# EAGLE board MultiWiiChassisv1.2 (EAGLE 5.11)
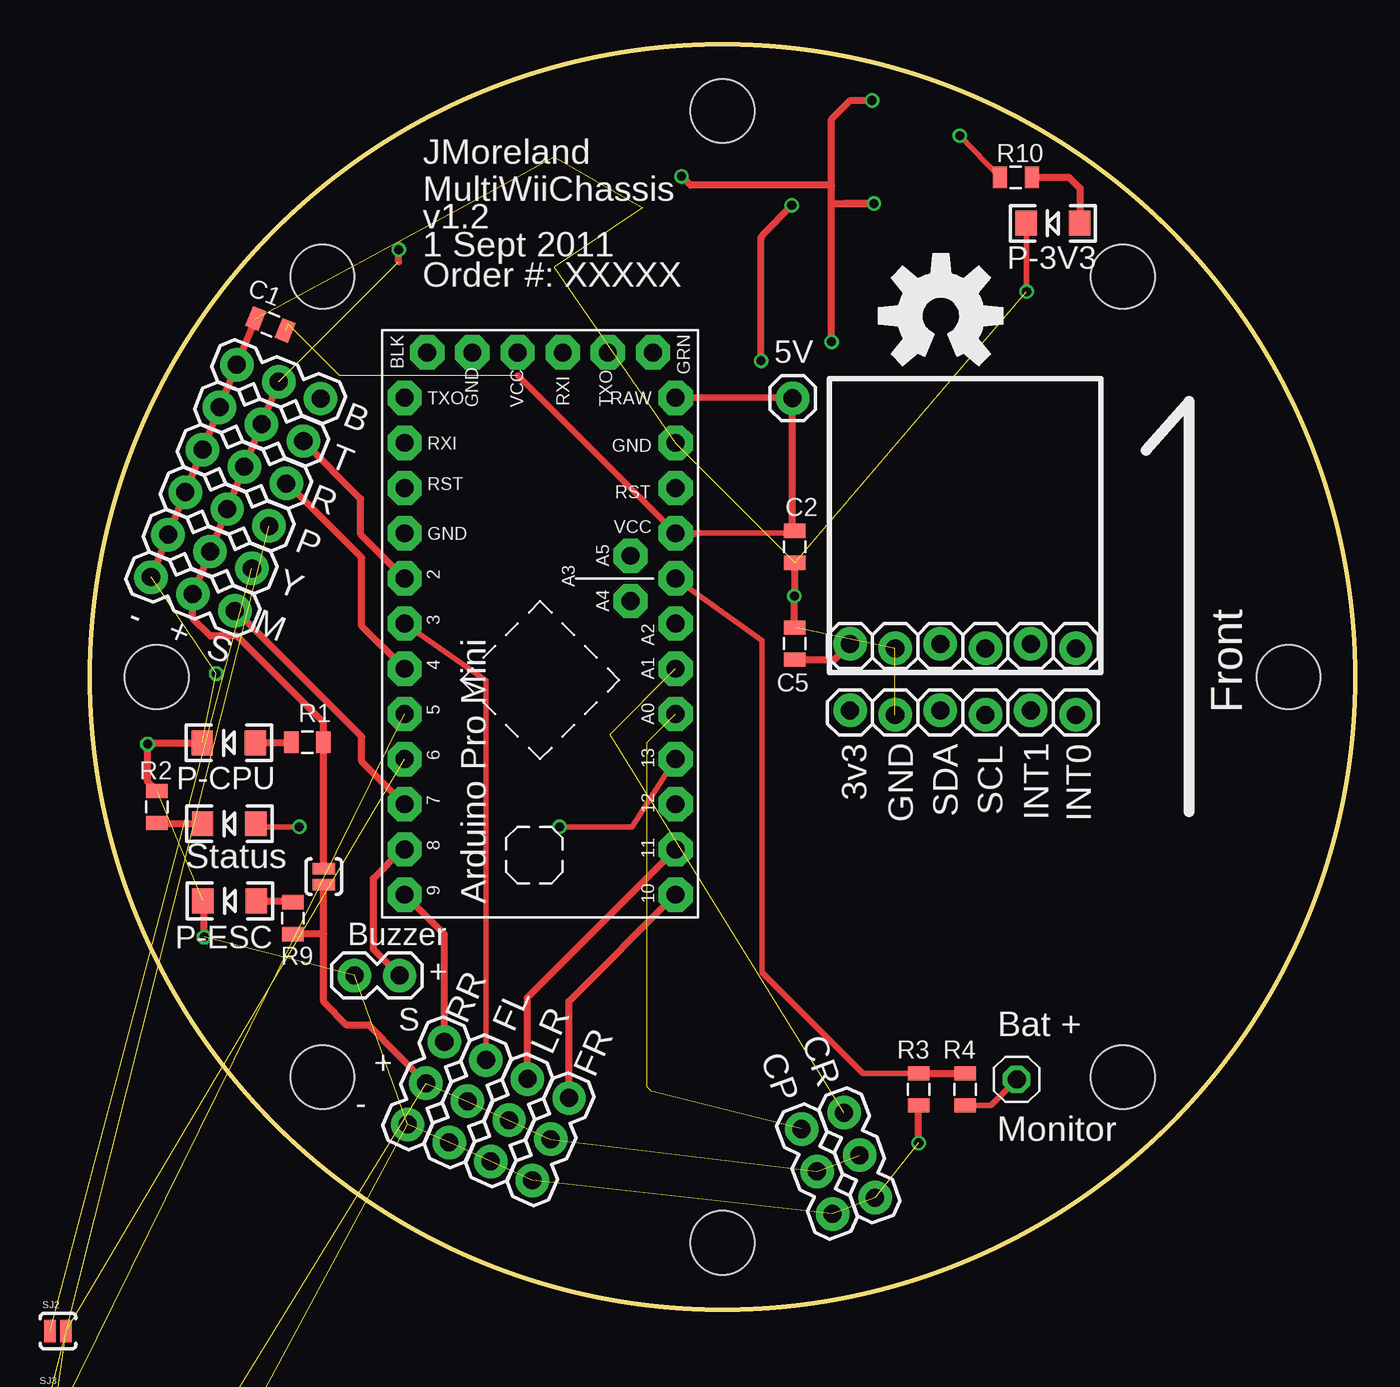
[diagram p0: board, top side]
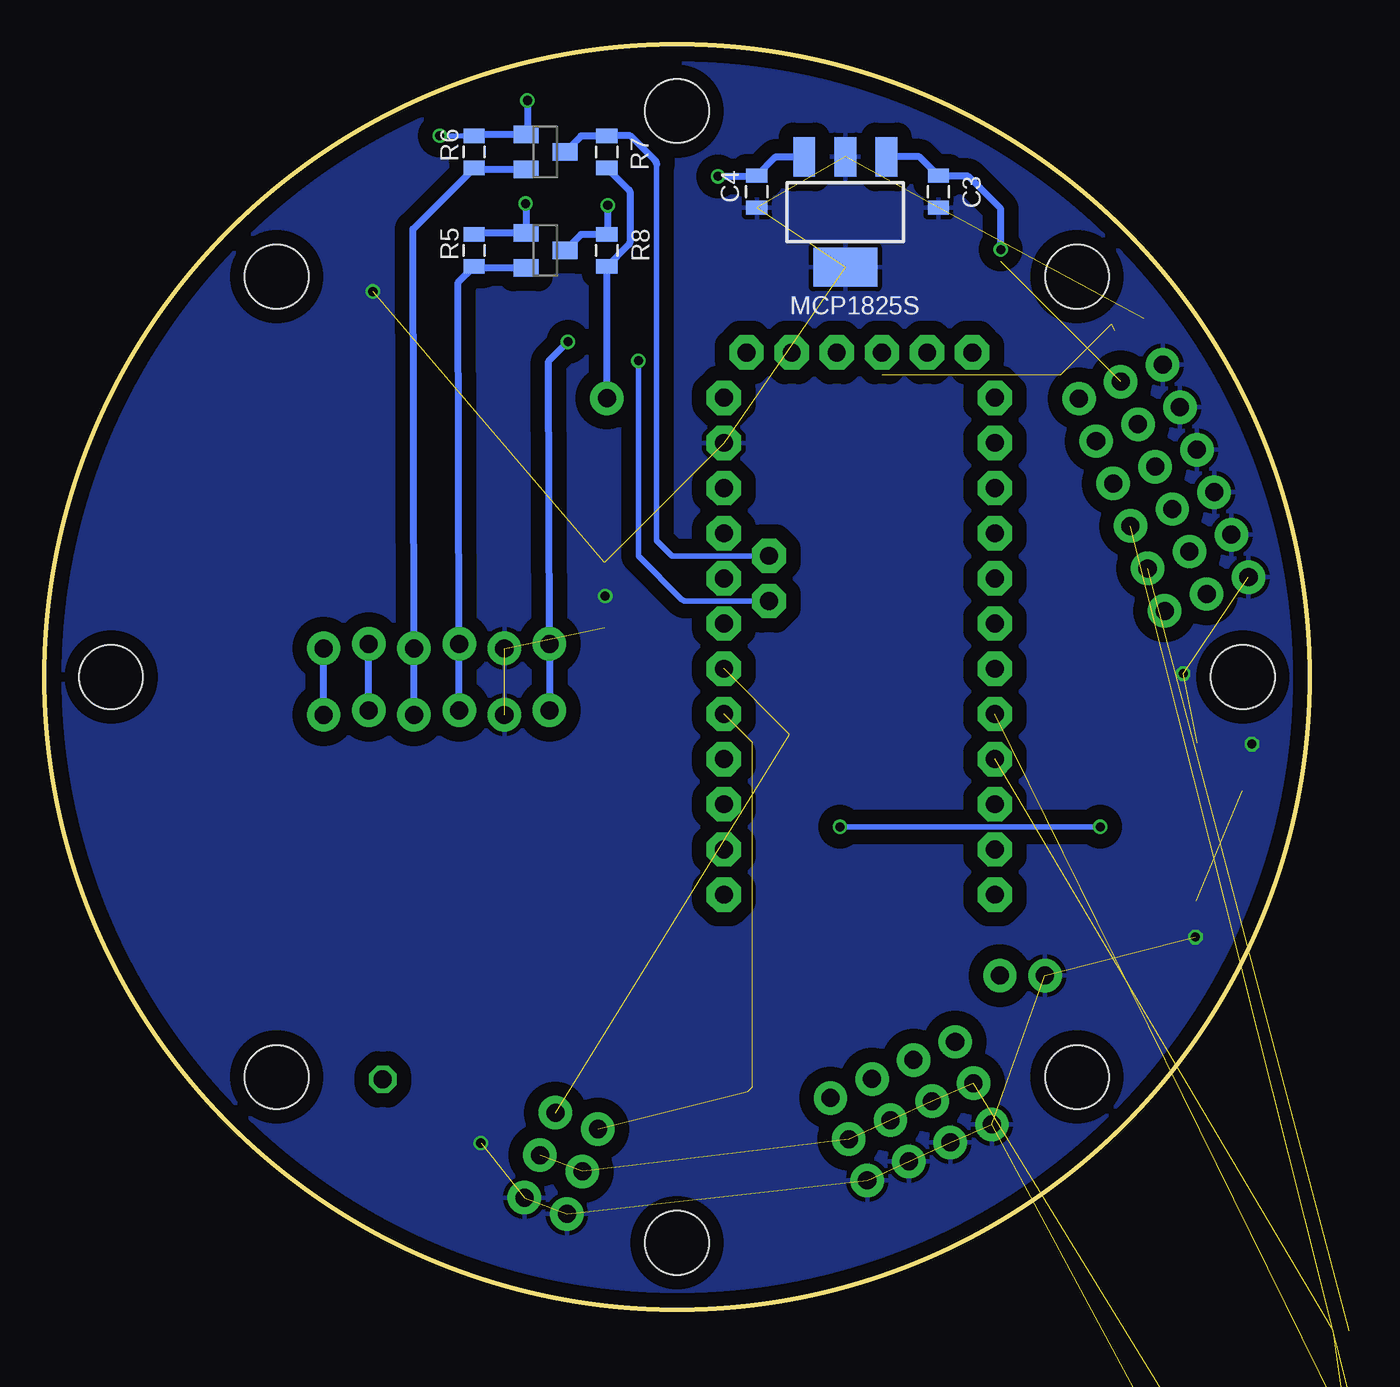
[diagram p1: board, bottom side, seen from below]

Size 71.12 x 71.12 mm. Coordinates in mm from the lower left corner, seen from the top.
Outline: circle at 35.56,35.56 radius 35.56
Copper layers (1*16): Top 0.035mm / dielectric 1.5mm / Bottom 0.035mm
Design rules "Fusion_eagle_rule_v1.1": minimum track width 6mil, minimum drill 12mil, track to track 6mil, track to pad 6mil, pad to pad 6mil, via to via 6mil, smd to smd 0mil, copper to edge 10mil, drill to drill 10mil, minimum pad ring 10mil, minimum via ring 6mil, stop-mask expansion 2mil, vias tented up to drill 100mil, thermal gap 10mil
Holes 3.6 mm at 35.56,67.38 67.38,35.56 35.56,3.74 3.74,35.56 13.06,13.06 13.06,58.06 58.06,58.06 58.06,13.06

## Footprints (pad centres in the part's own frame; a part is rotated, then mirrored left to right if it is on the bottom)
1X01 = drill 1.016 pad 1.88 round: 1 0,0
1X02 = drill 1.016 pad 1.88 round: 1 0,0; 2 2.54,0
SOT23_BOT = smd 1 x 1.4 bottom: D 0,1.1; G 0.98,-1.1; S -0.98,-1.1
0805 = smd 0.8 x 1.2: 1 -0.9,0; 2 0.9,0
1X03 = drill 1.016 pad 1.88 round: 1 0,0; 2 2.54,0; 3 5.08,0
1X01' = drill 1.016 octagon: 1 0,0
1X06_LOCK = drill 1.016 pad 1.88 round: 1 0,0; 2 2.54,-0.254; 3 5.08,0; 4 7.62,-0.254; 5 10.16,0; 6 12.7,-0.254
LED-1206 = smd 1.2 x 1.4: A -1.5,0; C 1.5,0
SOT223_BOT = smd 1.219 x 2.235 bottom: 1 2.311,-3.099; 2 0,-3.099; 3 -2.311,-3.099 | smd 3.6 x 2.2 bottom: GNDPAD 0,3.099
ARDUINO_PRO_MINI_FULL = drill 1 pad 1.93 octagon: A0 -5.08,-7.62; A1 -2.54,-7.62; A2 0,-7.62; A3 2.54,-7.62; A4 1.27,-5.08; A5 3.81,-5.08; BLK 15.24,6.35; D2 2.54,7.62; D3 0,7.62; D4 -2.54,7.62; D5 -5.08,7.62; D6 -7.62,7.62; D7 -10.16,7.62; D8 -12.7,7.62; D9 -15.24,7.62; D10 -15.24,-7.62; D11 -12.7,-7.62; D12 -10.16,-7.62; D13 -7.62,-7.62; GND 10.16,-7.62; GND2 15.24,3.81; GND3 5.08,7.62; GRN 15.24,-6.35; RAW 12.7,-7.62; RESET1 7.62,-7.62; RESET2 7.62,7.62; RXI 15.24,-1.27; RXI_2 10.16,7.62; TXO 15.24,-3.81; TXO_2 12.7,7.62; VCC 5.08,-7.62; VCC2 15.24,1.27
SJ_2S-NO = smd 0.635 x 1.27: 1 -0.45,0; 2 0.45,0

## Placement (x,y rotation side)
5V  M01PTH  [1X01]  39.5,51.23 0 top
+  Buzzer  [1X02]  17.4,18.77 180 top
BSS138-SCL  BSS138BOTTOM  [SOT23_BOT]  42.95,65.07 90 top
BSS138-SDA  BSS138BOTTOM  [SOT23_BOT]  42.95,59.54 90 top
C1  4.7uf  [0805]  10.13,55.37 158 top
C2  4.7uf  [0805]  39.62,42.88 270 top
C3  4.7uf  [0805]  20.85,62.84 270 bottom
C4  1uf  [0805]  31.06,62.84 270 bottom
C5  1uf  [0805]  39.62,37.44 90 top
JP1  T  [1X03]  11.99,48.82 158 top
JP2  R  [1X03]  11.02,46.43 158 top
JP3  P  [1X03]  10.06,44.04 158 top
JP4  Y  [1X03]  9.09,41.66 158 top
JP5  M  [1X03]  8.13,39.27 158 top
JP6  CR  [1X03]  42.39,11.05 290 top
JP7  RR  [1X03]  19.91,15.04 246 top
JP8  FL  [1X03]  22.25,14.02 246 top
JP9  LR  [1X03]  24.59,12.95 246 top
JP10  FR  [1X03]  26.92,11.89 246 top
JP11  Bat +  [1X01']  52.1,12.93 0 top
JP12  [1X06_LOCK]  42.72,33.68 0 top
JP13  CP  [1X03]  40.01,10.13 290 top
JP14  B  [1X03]  12.95,51.21 158 top
JP15  R  [1X03]  -2.46,-17.93 0 top  (outside the outline)
JP16  [1X06_LOCK]  42.72,37.41 0 top
JP17  L  [1X03]  -3.02,-25.55 0 top  (outside the outline)
LED1  Status  [LED-1206]  7.82,27.3 180 top
LED2  P-CPU  [LED-1206]  7.8,31.85 180 top
LED3  P-ESC  [LED-1206]  7.85,22.96 180 top
LED4  P-3V3  [LED-1206]  54.13,61.06 180 top
MCP1825S  V_REG_MCP1825S  [SOT223_BOT]  26.09,61.7 180 top
PROMINI  ARDUINO_PRO_MINI_FULL  [ARDUINO_PRO_MINI_FULL]  25.3,38.56 90 top
R1  220  [0805]  12.22,31.88 0 top
R2  220  [0805]  3.76,28.24 270 top
R3  33K  [0805]  46.58,12.37 90 top
R4  51K  [0805]  49.2,12.37 90 top
R5  10k  [0805]  46.96,59.54 90 bottom
R6  10k  [0805]  46.96,65.07 90 bottom
R7  10k  [0805]  39.5,65.07 270 bottom
R8  10k  [0805]  39.5,59.54 270 bottom
R9  220  [0805]  11.4,22 270 top
R10  180  [0805]  52.04,63.65 180 top
SJ1  SOLDERJUMPERNO  [SJ_2S-NO]  13.13,24.33 270 top
SJ2  SOLDERJUMPERNO  [SJ_2S-NO]  -1.8,-1.22 0 top
SJ3  SOLDERJUMPERNO  [SJ_2S-NO]  -1.96,-5.49 0 top  (outside the outline)
SJ4  SOLDERJUMPERNO  [SJ_2S-NO]  -2.11,-9.75 0 top  (outside the outline)
SJ5  SOLDERJUMPERNO  [SJ_2S-NO]  -2.26,-14.07 0 top  (outside the outline)
U$10  [OSHW-LOGO-L]  47.83,55.85 0 top

## Library data of the parts
5V + C1-C5 JP1-JP10 JP12-JP17 LED1-LED4 R1-R10 SJ1-SJ5 U$10 = SparkFun
BSS138-SCL BSS138-SDA MCP1825S = JCM
JP11 = pinhead
PROMINI = MultiWiiArduino

## Nets
3.3V: BSS138-SCL.G BSS138-SDA.G C4.1 C5.1 JP12.1 JP16.1 MCP1825S.3 R5.2 R6.2 R10.2
5V: 5V.1 C1.1 C2.1 C3.1 JP1.2 JP2.2 JP3.2 JP4.2 JP5.2 JP14.2 MCP1825S.1 PROMINI.RAW PROMINI.VCC R1.2 R7.2 R8.2 SJ1.1
BUZZER: +.1 PROMINI.D8
D5: PROMINI.D5 SJ3.2 SJ5.1
D6: PROMINI.D6 SJ2.2 SJ4.1
GND: +.2 C1.2 C2.2 C3.2 C4.2 C5.2 JP1.3 JP2.3 JP3.3 JP4.3 JP5.3 JP6.3 JP7.3 JP8.3 JP9.3 JP10.3 JP12.2 JP13.3 JP14.3 JP15.3 JP16.2 JP17.3 LED2.C LED3.C LED4.C MCP1825S.2 MCP1825S.GNDPAD PROMINI.GND R2.1 R3.1
GND2: PROMINI.GND2
GND3: PROMINI.GND3
INT0: JP12.6 JP16.6
INT1: JP12.5 JP16.5
N$1: LED1.C R2.2
N$2: LED2.A R1.1
N$3: JP11.1 R4.1
N$4: PROMINI.A3 R3.2 R4.2
N$5: LED1.A PROMINI.D13
N$6: JP1.1 PROMINI.D2
N$7: JP2.1 PROMINI.D4
N$8: JP3.1 SJ3.1
N$9: JP15.1 SJ4.2
N$10: JP5.1 PROMINI.D7
N$11: JP8.1 PROMINI.D3
N$12: JP7.1 PROMINI.D9
N$13: LED4.A R10.1
N$14: JP10.1 PROMINI.D10
N$15: JP6.1 PROMINI.A1
N$16: LED3.A R9.1
N$17: JP4.1 SJ2.1
N$18: JP17.1 SJ5.2
N$19: JP13.1 PROMINI.A0
N$23: JP9.1 PROMINI.D11
SCL: BSS138-SCL.D PROMINI.A5 R7.1
SCL-L: BSS138-SCL.S JP12.4 JP16.4 R6.1
SDA: BSS138-SDA.D PROMINI.A4 R8.1
SDA-L: BSS138-SDA.S JP12.3 JP16.3 R5.1
VCC2: PROMINI.VCC2
VESC: JP6.2 JP7.2 JP8.2 JP9.2 JP10.2 JP13.2 JP15.2 JP17.2 R9.2 SJ1.2

## Tracks (layer width: path | path; a pad name or v marks a point on that pad's centre or on a via)
3.3V  (via drill 0.51)
  Top 0.305: v48.9,65.99 R10.2
  Top 0.406: 41.68,62.18 41.68,63.2 | v41.68,54.41 41.68,62.18 | v33.25,63.7 33.76,63.2 41.68,63.2 | 42.37,62.18 v44.07,62.18 41.68,62.18 | 42.78,67.97 v43.97,67.97 arc45 43.95,67.98 42.76,67.98 41.68,66.9 41.68,63.2 | C5.1 41.85,36.54 JP16.1
  Bottom 0.305: R6.2 v48.9,65.99
  Bottom 0.406: MCP1825S.3 30.01,64.8 C4.1 31.1,63.7 v33.25,63.7 | R6.2 46.88,66.06 BSS138-SCL.G arc-45 43.97,66.26 v43.97,67.97 | R5.2 46.88,60.52 BSS138-SDA.G 44.05,62.16 v44.07,62.18 | v41.68,54.41 42.77,53.31 JP16.1 JP12.1
5V  (via drill 0.51)  (6 unrouted)
  Top 0.305: PROMINI.VCC arc45 34.27,43.68 | PROMINI.VCC 39.62,43.64 | 24.03,52.53 PROMINI.VCC
  Top 0.406: JP14.2 JP1.2 JP2.2 JP3.2 JP4.2 JP5.2 5.77,38.85 6.78,37.85 8.25,37.85 13.12,32.98 R1.2 | R1.2 13.03,31.96 | PROMINI.RAW 5V.1 39.5,43.9 C2.1 39.62,43.64 | R1.2 13.12,24.8 SJ1.1 | 17.35,58.91 v17.35,59.59
  Bottom 0.406: MCP1825S.1 21.91,64.8 C3.1 20.82,63.7 19.18,63.7 17.35,61.87 v17.35,59.59 | R7.2 38.27,62.95 arc45 38.18,62.72 38.18,60.09 arc45 38.27,59.87 R8.2 5V.1
BUZZER
  Top 0.406: PROMINI.D8 17.55,25.86 15.93,24.23 15.93,20.24 +.1
D5  (2 unrouted)
D6  (2 unrouted)
GND  (via drill 0.51)  (22 unrouted)
  Top 0.305: v52.65,57.23 LED4.C
  Top 0.406: JP5.3 JP4.3 JP3.3 JP2.3 JP1.3 JP14.3 C1.2 | R2.1 3.23,29.68 v3.23,31.77 3.3,31.85 LED2.C | v6.4,20.93 6.4,22.91 LED3.C | C2.2 39.62,40.18 39.6,40.16 v39.6,40.11 39.6,38.37 C5.2 | v46.58,9.35 R3.1
  other vias: 7.09,35.74
  pour Bottom (isolate 0.813): -0.25,0.13 71.12,-0.13 71.25,70.99 -0.13,71.25
INT0
  Bottom 0.406: JP12.6 JP16.6
INT1
  Bottom 0.406: JP12.5 JP16.5
N$1
  Top 0.406: R2.2 3.8,27.3 LED1.C
N$2
  Top 0.406: LED2.A 9.32,31.88 R1.1
N$3
  Top 0.305: R4.1 50.64,11.47 JP11.1
N$4
  Top 0.305: PROMINI.A3 37.77,37.62 37.77,18.95 43.46,13.26 R3.2
  Top 0.406: R3.2 R4.2
N$5  (via drill 0.51)
  Top 0.305: PROMINI.D13 30.48,27.13 v26.39,27.13 | 9.5,27.13 v11.76,27.13
  Top 0.406: LED1.A 9.5,27.13
  Bottom 0.305: v11.76,27.13 v26.39,27.13
N$6
  Top 0.406: JP1.1 11.99,48.79 15.21,45.57 15.21,43.56 PROMINI.D2
N$7
  Top 0.406: JP2.1 11.1,46.43 15.27,42.27 15.27,38.43 PROMINI.D4
N$8  (1 unrouted)
  Top 0.406: JP3.1 10.08,44.04
N$9  (1 unrouted)
N$10
  Top 0.406: JP5.1 8.2,39.27 15.27,32.21 15.27,30.81 PROMINI.D7
N$11
  Top 0.305: PROMINI.D3 22.25,35.36 JP8.1
N$12
  Top 0.406: PROMINI.D9 19.91,21.08 JP7.1
N$13
  Top 0.406: R10.1 55.04,63.65 55.65,63.04 55.65,61.09 LED4.A
N$14
  Top 0.406: PROMINI.D10 26.92,17.32 JP10.1
N$15  (2 unrouted)
N$16
  Top 0.406: LED3.A 11.34,22.96 R9.1
N$17  (1 unrouted)
  Top 0.406: JP4.1 9.12,41.66
N$18  (1 unrouted)
N$19  (4 unrouted)
N$23
  Top 0.406: PROMINI.D11 24.59,17.53 JP9.1
SCL
  Bottom 0.305: 36.7,64.39 36.7,43.23 35.84,42.37 PROMINI.A5
  Bottom 0.406: R7.1 39.43,66.04 | R7.1 40.95,65.97 BSS138-SCL.D | 36.7,64.39 arc-45 36.8,64.61 38.18,65.99 39.46,65.99 arc-45 R7.1
SCL-L
  Bottom 0.406: BSS138-SCL.S 46.88,64.09 R6.1 50.39,60.75 JP16.4 JP12.4
SDA  (via drill 0.51)
  Top 0.406: v37.72,53.34 37.72,60.17 arc-45 37.81,60.39 v39.45,62.08
  Bottom 0.305: v37.72,53.34 37.73,42.36 35.29,39.92 arc-45 35.06,39.83 PROMINI.A4
  Bottom 0.406: BSS138-SDA.D 40.95,60.44 R8.1 arc-45 39.45,60.56 v39.45,62.08
SDA-L
  Bottom 0.406: BSS138-SDA.S 46.88,58.56 R5.1 47.85,57.75 JP16.3 JP12.3
VESC  (7 unrouted)
  Top 0.406: JP7.2 15.64,16 14.4,16 13.13,17.27 13.13,21.08 | 13.13,21.08 SJ1.2 | R9.2 13.12,21.1 13.13,21.08

## Text on the board
tPlace: JMoreland | MultiWiiChassis | v1.2 | 1 Sept 2011 | Order #: XXXXX | - | + | Front | S | 3v3 | GND | SDA | SCL | INT1 | INT0 | S | + | - | Monitor
Document: Round MultiWiiCopter chassis - CPU and Instruments level
201bmp: /Users/jmoreland/Documents/test5.bmp